# EAGLE board ajile_ximea_trigger_adapter (EAGLE 9.0.1)
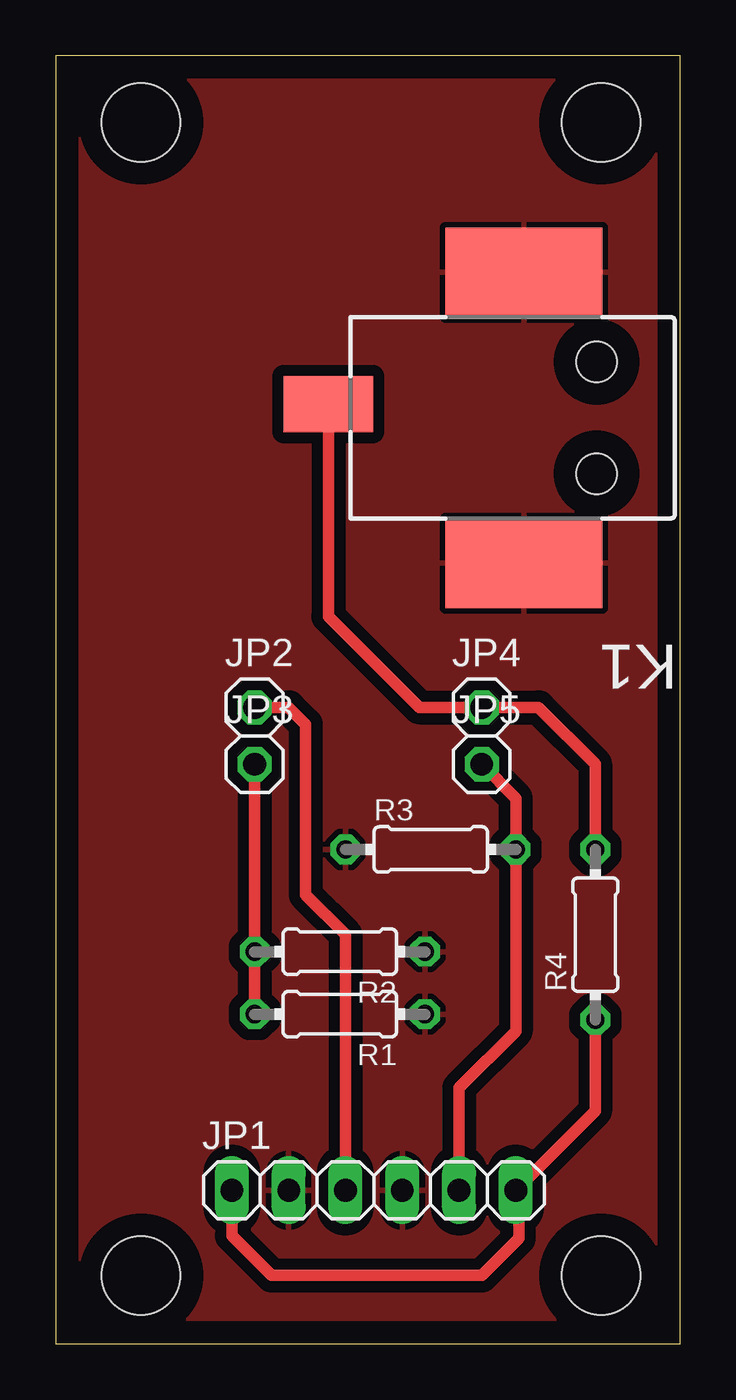
[diagram p0: board, top side]
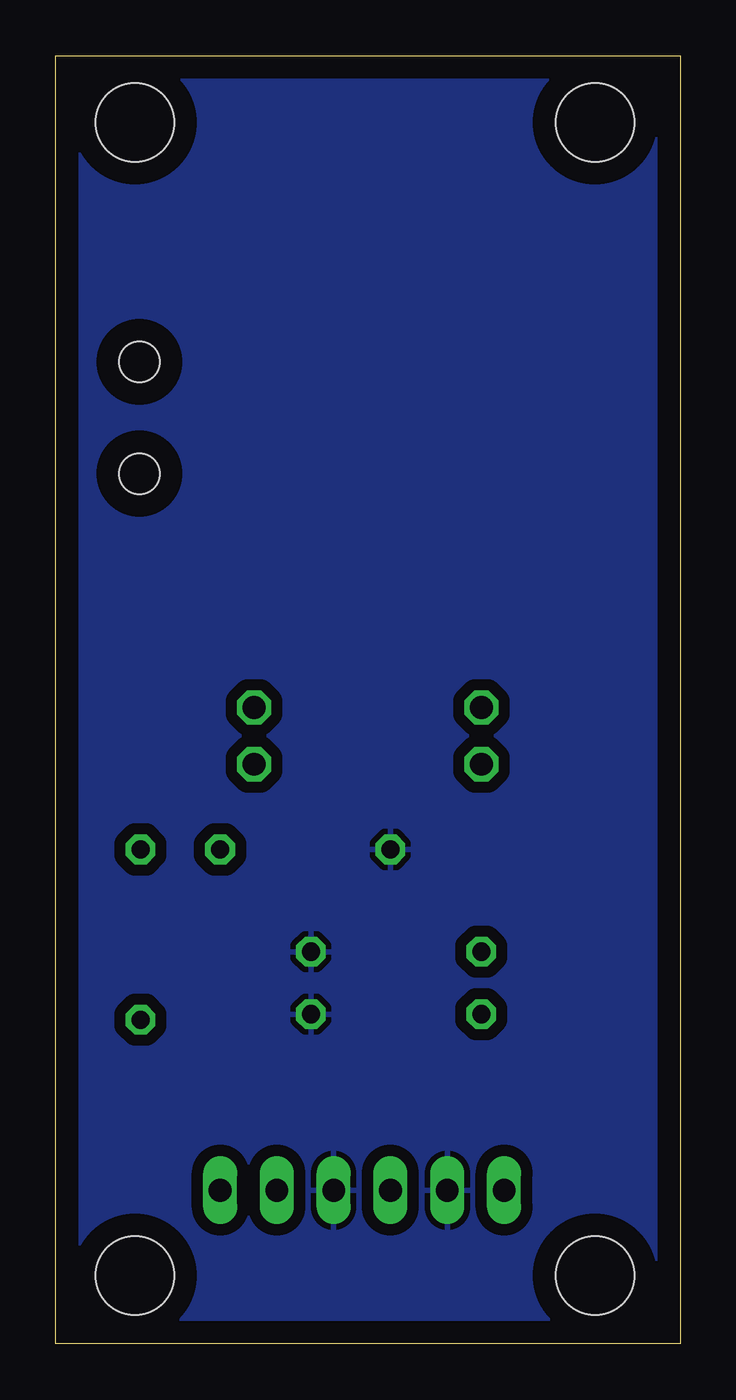
[diagram p1: board, bottom side, seen from below]

Size 27.92 x 57.58 mm. Coordinates in mm from the lower left corner, seen from the top.
Outline: 0,0 27.92,0 27.92,57.58 0,57.58 0,0
Copper layers (1*16): Top 0.035mm / dielectric 1.5mm / Bottom 0.035mm
Design rules "default": minimum track width 6mil, minimum drill 0.35mm, track to track 6mil, track to pad 6mil, pad to pad 6mil, via to via 6mil, smd to smd 6mil, copper to edge 40mil, drill to drill 6mil, minimum pad ring 10mil, minimum via ring 8mil, stop-mask expansion 4mil, vias tented up to drill 0mil, thermal gap 10mil
Holes 3.5 mm at 3.81,3.05 24.38,3.05 3.81,54.61 24.38,54.61

## Footprints (pad centres in the part's own frame; a part is rotated, then mirrored left to right if it is on the bottom)
1X06 = drill 1.016 long: 1 -6.35,0; 2 -3.81,0; 3 -1.27,0; 4 1.27,0; 5 3.81,0; 6 6.35,0
1X01 = drill 1.016 octagon: 1 0,0
694108105102 = smd 4 x 2.5: 1 15.5,-0.6 | smd 7 x 4: 2 6.75,6.5; 3 6.75,-6.5 | hole 1.8: 3.5,2.5; 3.5,-2.5
0204/7 = drill 0.813 octagon: 1 -3.81,0; 2 3.81,0

## Placement (x,y rotation side)
JP1  [1X06]  14.22,6.86 0 top
JP2  [1X01]  8.89,28.45 0 top
JP3  [1X01]  8.89,25.91 0 top
JP4  [1X01]  19.05,28.45 0 top
JP5  [1X01]  19.05,25.91 0 top
K1  694108105102  [694108105102]  27.69,41.4 180 top
R1  100  [0204/7]  12.7,14.73 180 top
R2  100  [0204/7]  12.7,17.53 180 top
R3  2.2k  [0204/7]  16.76,22.1 0 top
R4  1k  [0204/7]  24.13,18.29 90 top

## Library data of the parts
JP1-JP5 = pinhead
K1 = Wurth_Elektronik_Electromechanic_DC_Power_Jack_Connectors_rev15c
R1-R4 = rcl; SPICEPREFIX: R

## Nets
5V: JP4.1 K1.1 R4.2
AJILE_IN: JP1.1 JP1.6 R4.1
AJILE_OUT: JP1.3 JP2.1
GND: JP1.2 JP1.4 K1.2 K1.3 R1.1 R2.1 R3.1
N$2: JP3.1 R1.2 R2.2
XIMEA_IN: JP1.5 JP5.1 R3.2

## Tracks (layer width: path | path; a pad name or v marks a point on that pad's centre or on a via)
5V
  Top 0.508: K1.1 12.19,32.52 16.26,28.45 JP4.1 21.59,28.45 24.13,25.91 R4.2
AJILE_IN
  Top 0.508: R4.1 24.13,10.41 20.7,6.99 | 20.7,6.99 JP1.6 | JP1.1 7.87,4.83 9.65,3.05 19.05,3.05 20.7,4.7 20.7,6.99
AJILE_OUT
  Top 0.508: JP2.1 10.41,28.45 11.18,27.69 11.18,20.07 12.95,18.29 JP1.3
GND
  pour Top (isolate 0.508): 0,57.4 27.94,57.4 27.94,0 0,0
  pour Bottom (isolate 0.508): -0.51,58.17 28.45,58.17 28.45,-0.76 -0.51,-0.76
N$2
  Top 0.508: JP3.1 R2.2 R1.2
XIMEA_IN
  Top 0.508: JP5.1 20.57,24.38 R3.2 20.57,13.97 18.03,11.43 JP1.5